# EAGLE board APP_UD (EAGLE 6.1)
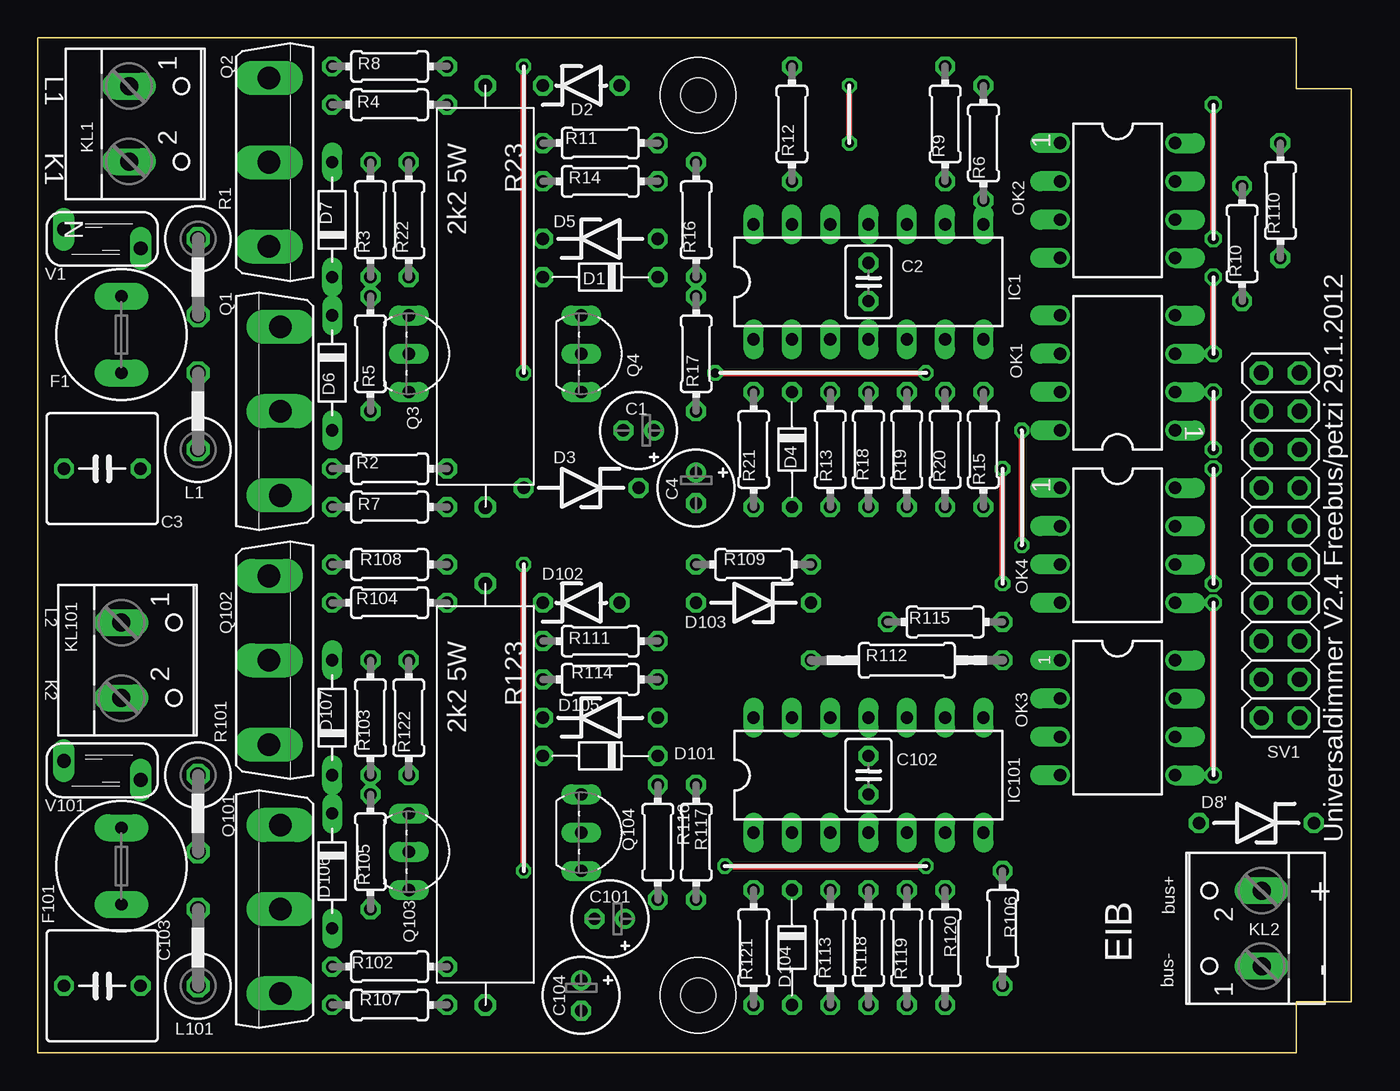
[diagram p0: board, top side]
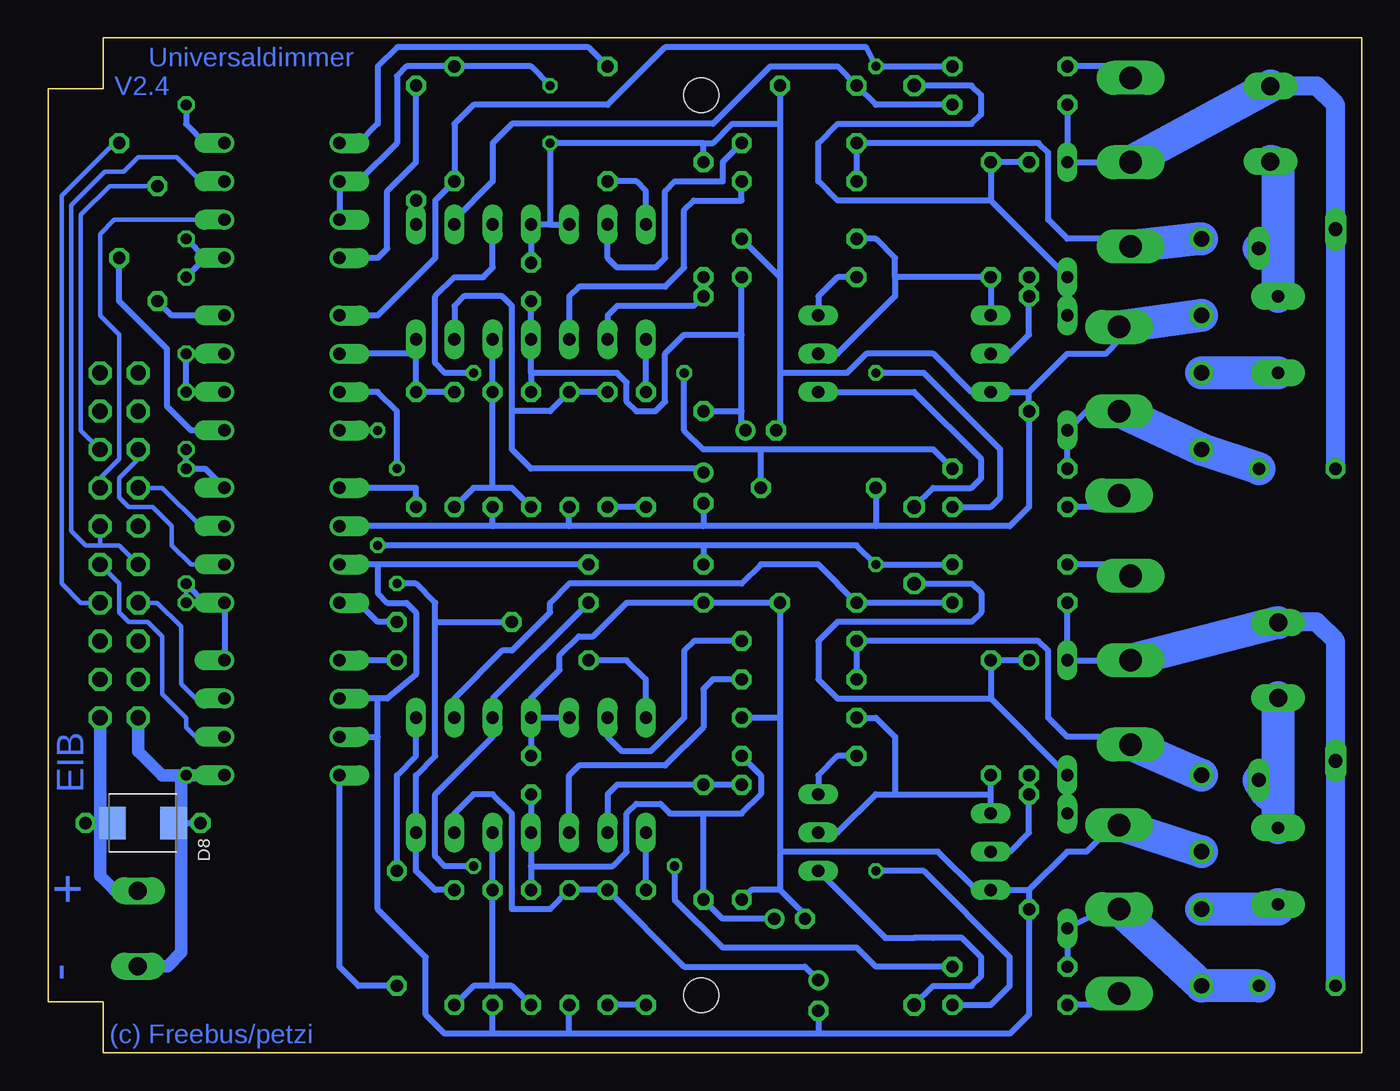
[diagram p1: board, bottom side, seen from below]

Size 87.1 x 67.31 mm. Coordinates in mm from the lower left corner, seen from the top.
Outline: 0,0.01 83.45,0 83.45,3.38 87.1,3.38 87.1,63.93 83.45,63.93 83.45,67.31 0,67.31 0,0.01
Copper layers (1*16): Top 0.035mm / dielectric 1.5mm / Bottom 0.035mm
Design rules: minimum track width 10mil, minimum drill 23mil, track to track 12mil, track to pad 12mil, pad to pad 16mil, via to via 16mil, smd to smd 8mil, copper to edge 10mil, drill to drill 10mil, minimum pad ring 10mil, minimum via ring 8mil, stop-mask expansion 4mil, vias tented up to drill 0mil, thermal gap 10mil
Holes 2.3 mm at 43.79,3.81 43.79,63.5

## Footprints (pad centres in the part's own frame; a part is rotated, then mirrored left to right if it is on the bottom)
E2-5 = drill 0.813 pad 1.27: + -1.016,0 | drill 0.813 pad 1.27 octagon: - 1.016,0
C025-030X050 = drill 0.813 octagon: 1 -1.27,0; 2 1.27,0
C050-075X075 = drill 0.813 octagon: 1 -2.54,0; 2 2.54,0
D-7 = drill 0.813 octagon: A 3.81,0; C -3.81,0
ZDIO-5 = drill 0.813 octagon: A 2.54,0; C -2.54,0
ZDIO-7.5 = drill 0.813 octagon: A 3.81,0; C -3.81,0
D-7.5 = drill 0.813 long: A 3.81,0; C -3.81,0
SMBJ = smd 1.78 x 2.16: A 2.04,0; C -2.03,0
TR5 = drill 0.813 pad 1.778 long: 1 -2.54,0; 2 2.54,0
DIL14 = drill 0.813 long: 1 -7.62,-3.81; 2 -5.08,-3.81; 3 -2.54,-3.81; 4 0,-3.81; 5 2.54,-3.81; 6 5.08,-3.81; 7 7.62,-3.81; 8 7.62,3.81; 9 5.08,3.81; 10 2.54,3.81; 11 0,3.81; 12 -2.54,3.81; 13 -5.08,3.81; 14 -7.62,3.81
W237-102 = drill 1.194 long: 1 -2.5,-1.27; 2 2.5,-1.27
0414V = drill 1.016 octagon: 1 -2.54,0; 2 2.54,0
DIL08 = drill 0.813 offset: 1 -3.81,-3.81; 2 -1.27,-3.81; 3 1.27,-3.81; 4 3.81,-3.81; 5 3.81,3.81; 6 1.27,3.81; 7 -1.27,3.81; 8 -3.81,3.81
TO247BV = drill 1.499 long: D 0,-2.921; G -5.588,-2.921; S 5.588,-2.921
TO92-EBC = drill 0.813 long: B 0,-1.27; C -2.54,-1.27; E 2.54,-1.27
TO92-EBC' = drill 0.813 long: B 0,-1.27; C 2.54,-1.27; E -2.54,-1.27
0204/7 = drill 0.813 octagon: 1 -3.81,0; 2 3.81,0
KH208-8_10B = drill 0.9 octagon: P$1 -13.97,0; P$2 13.97,0
0207/12 = drill 0.813 octagon: 1 -6.35,0; 2 6.35,0
2X10 = drill 1.016 octagon: 1 -11.43,-1.27; 2 -11.43,1.27; 3 -8.89,-1.27; 4 -8.89,1.27; 5 -6.35,-1.27; 6 -6.35,1.27; 7 -3.81,-1.27; 8 -3.81,1.27; 9 -1.27,-1.27; 10 -1.27,1.27; 11 1.27,-1.27; 12 1.27,1.27; 13 3.81,-1.27; 14 3.81,1.27; 15 6.35,-1.27; 16 6.35,1.27; 17 8.89,-1.27; 18 8.89,1.27; 19 11.43,-1.27; 20 11.43,1.27
S05K11 = drill 0.914 long: 1 -0.635,-2.54; 2 0.635,2.54

## Placement (x,y rotation side)
C1  47u  [E2-5]  39.84,41.27 180 top
C2  100n  [C025-030X050]  55.08,51.12 90 top
C3  6.8nF  [C050-075X075]  4.28,38.73 180 top
C4  47u  [E2-5]  43.65,37.46 270 top
C101  47u  [E2-5]  37.94,8.89 180 top
C102  100n  [C025-030X050]  55.08,18.42 90 top
C103  6.8nF  [C050-075X075]  4.28,4.45 180 top
C104  47u  [E2-5]  36.03,3.81 270 top
D1  1N4007  [D-7]  37.3,51.43 180 top
D2  ZF6.8  [ZDIO-5]  36.03,64.14 0 top
D3  ZF6.8  [ZDIO-7.5]  36.03,37.46 180 top
D4  1N4148  [D-7]  50,40 270 top
D5  ZF15  [ZDIO-7.5]  37.3,53.98 0 top
D6  1N4007  [D-7.5]  19.52,45.09 270 top
D7  1N4007  [D-7.5]  19.52,55.24 90 top
D8  SMAJ40CA  [SMBJ]  80.8,15.24 0 bottom
D8'  P6KE39A  [ZDIO-7.5]  80.8,15.24 180 top
D101  1N4007  [D-7]  37.3,19.69 180 top
D102  ZF6.8  [ZDIO-5]  36.03,29.85 0 top
D103  ZF6.8  [ZDIO-7.5]  47.46,29.85 180 top
D104  1N4148  [D-7]  50,6.98 270 top
D105  ZF15  [ZDIO-7.5]  37.3,22.23 0 top
D106  1N4007  [D-7.5]  19.52,12.06 270 top
D107  1N4007  [D-7.5]  19.52,22.23 90 top
F1  2A  [TR5]  5.55,47.62 270 top
F101  2A  [TR5]  5.55,12.38 270 top
IC1  LM324N  [DIL14]  55.08,51.12 0 top
IC101  LM324N  [DIL14]  55.08,18.42 0 top
KL1  [W237-102]  7.32,61.59 270 top
KL2  [W237-102]  79.88,8.26 90 top
KL101  [W237-102]  6.82,26.04 270 top
L1  3uH  [0414V]  10.63,42.54 90 top
L101  3uH  [0414V]  10.63,6.98 90 top
OK1  ILD74  [DIL08]  71.59,45.09 90 top
OK2  ILD74  [DIL08]  71.59,56.52 270 top
OK3  ILD74  [DIL08]  71.59,22.23 270 top
OK4  ILD74  [DIL08]  71.59,33.66 270 top
Q1  IRFP460  [TO247BV]  13.17,42.54 90 top
Q2  IRFP460  [TO247BV]  18.25,59.05 270 top
Q3  BC546B  [TO92-EBC]  25.87,46.35 270 top
Q4  MPSA44  [TO92-EBC']  37.3,46.35 270 top
Q101  IRFP460  [TO247BV]  13.17,9.53 90 top
Q102  IRFP460  [TO247BV]  18.25,26.04 270 top
Q103  BC546B  [TO92-EBC]  25.87,13.33 270 top
Q104  MPSA44  [TO92-EBC']  37.3,14.61 270 top
R1  0,1  [0414V]  10.63,51.43 270 top
R2  100k  [0204/7]  23.33,38.73 0 top
R3  4M3  [0204/7]  22.06,55.24 90 top
R4  100k  [0204/7]  23.33,62.86 0 top
R5  22k  [0204/7]  22.06,46.35 90 top
R6  5k6  [0204/7]  62.7,60.32 270 top
R7  1k  [0204/7]  23.33,36.2 180 top
R8  1k  [0204/7]  23.33,65.41 180 top
R9  22k  [0204/7]  60.16,61.59 90 top
R10  1k  [0204/7]  79.84,53.66 270 top
R11  100  [0204/7]  37.3,60.32 180 top
R12  100k  [0204/7]  50,61.59 270 top
R13  100k  [0204/7]  52.54,40 270 top
R14  100k  [0204/7]  37.3,57.78 180 top
R15  12k  [0204/7]  62.7,40 90 top
R16  3k9  [0204/7]  43.65,55.24 90 top
R17  220k  [0204/7]  43.65,46.35 90 top
R18  100k  [0204/7]  55.08,40 270 top
R19  100k  [0204/7]  57.62,40 90 top
R20  22k  [0204/7]  60.16,40 270 top
R21  470  [0204/7]  47.46,40 90 top
R22  100k  [0204/7]  24.6,55.24 90 top
R23  2k2 5W  [KH208-8_10B]  29.68,50.16 270 top
R101  0,1  [0414V]  10.63,15.88 270 top
R102  100k  [0204/7]  23.33,5.71 0 top
R103  4M3  [0204/7]  22.06,22.23 90 top
R104  100k  [0204/7]  23.33,29.85 0 top
R105  22k  [0204/7]  22.06,13.33 90 top
R106  5k6  [0204/7]  63.97,8.26 90 top
R107  1k  [0204/7]  23.33,3.17 180 top
R108  1k  [0204/7]  23.33,32.38 180 top
R109  22k  [0204/7]  47.46,32.38 0 top
R110  1k  [0204/7]  82.38,56.52 270 top
R111  100  [0204/7]  37.3,27.31 180 top
R112  100k  [0207/12]  57.62,26.04 180 top
R113  100k  [0204/7]  52.54,6.98 270 top
R114  100k  [0204/7]  37.3,24.77 180 top
R115  12k  [0204/7]  60.16,28.58 180 top
R116  3k9  [0204/7]  41.11,13.97 270 top
R117  220k  [0204/7]  43.65,13.97 90 top
R118  100k  [0204/7]  55.08,6.98 270 top
R119  100k  [0204/7]  57.62,6.98 270 top
R120  22k  [0204/7]  60.16,6.98 90 top
R121  470  [0204/7]  47.46,6.98 90 top
R122  100k  [0204/7]  24.6,22.23 90 top
R123  2k2 5W  [KH208-8_10B]  29.68,17.15 270 top
SV1  [2X10]  82.38,33.66 90 top
V1  7N391K  [S05K11]  4.28,53.98 270 top
V101  7N391K  [S05K11]  4.28,18.73 270 top

## Library data of the parts
C1-C4 C101-C104 L1 L101 R1-R22 R101-R122 = rcl
D1-D8 D8' D101-D107 = diode
F1 F101 = fuse
IC1 IC101 = linear
KL1 KL2 KL101 = con-wago-500
OK1-OK4 = optocoupler
Q1 Q2 Q101 Q102 = transistor-power
Q3 Q103 = transistor-npn
Q4 Q104 = transistor
R23 R123 = resistor-power
SV1 = pinhead
V1 V101 = varistor

## Nets
AGND1: C1.- C2.2 C4.- D2.A D3.A D5.A IC1.11 IC1.12 OK2.2 OK2.3 OK4.2 Q1.S Q3.E R1.2 R5.1 R9.2 R13.2 R16.2 R19.1
AGND2: C101.- C102.2 C104.- D102.A D103.A D105.A IC101.11 IC101.12 OK3.2 OK3.3 OK4.3 Q101.S Q103.E R101.2 R105.1 R109.2 R113.2 R116.2 R119.2
GND: D8'.A D8.A KL2.1 OK1.2 OK1.3 OK2.5 OK2.8 OK3.5 OK3.8 OK4.5 OK4.8 SV1.2
N$1: R10.1 SV1.15
N$2: OK1.4 R10.2
N$3: C3.1 D6.A L1.1 Q1.D R2.1
N$4: Q2.S R1.1 R11.2 R14.2
N$5: OK2.6 SV1.13
N$6: IC1.7 OK1.6 R15.2 R20.1
N$7: OK2.7 SV1.10 SV1.11
N$8: F1.1 KL1.2 V1.2
N$9: Q2.G R8.2
N$10: OK1.1 R110.2
N$11: IC1.3 R14.1
N$12: D6.C D7.C R3.2 R22.2 R23.P$1
N$13: OK2.4 R6.1
N$14: IC101.7 OK1.7 R115.2 R120.2
N$15: IC1.8 R6.2
N$16: Q3.B R3.1 R5.2
N$17: Q1.G R7.2
N$18: C3.2 D7.A KL1.1 Q2.D R4.1 V1.1
N$20: D8'.C D8.C KL2.2 SV1.1
N$21: IC1.2 R16.1 R17.2
N$22: F1.2 L1.2
N$23: D3.C IC1.10 R2.2
N$24: D2.C IC1.9 R4.2
N$25: IC1.1 R21.2
N$26: C103.2 D107.A KL101.1 Q102.D R104.1 V101.1
N$27: OK3.1 R112.1
N$28: OK2.1 R12.1
N$30: C4.+ D4.C IC1.6 R13.1
N$31: D5.C Q3.C Q4.B R22.1
N$32: OK4.1 R15.1
N$33: OK4.7 SV1.14
N$34: IC1.5 R18.2 R19.2 R20.2
N$35: Q4.C R23.P$2
N$36: OK1.8 R107.1 R108.1 R109.1
N$38: Q102.S R101.1 R111.2 R114.2
N$40: Q102.G R108.2
N$42: D106.C D107.C R103.2 R122.2 R123.P$1
N$43: D103.C IC101.10 R102.2
N$44: D102.C IC101.9 R104.2
N$45: OK3.4 R106.1
N$46: IC101.8 R106.2
N$47: D1.A Q4.E
N$48: IC1.14 R12.2
N$49: Q103.B R103.1 R105.2
N$50: OK3.6 SV1.9
N$51: OK3.7 SV1.8
N$52: R110.1 SV1.7
N$53: Q101.G R107.2
N$54: IC101.13 R111.1
N$55: D105.C Q103.C Q104.B R122.1
N$57: IC101.3 R114.1
N$58: IC101.2 R116.1 R117.2
N$59: IC101.1 R121.2
N$60: C104.+ D104.C IC101.6 R113.1
N$61: OK4.4 R115.1
N$62: OK4.6 SV1.16
N$63: Q104.C R123.P$2
N$64: D4.A R21.1
N$65: D104.A R121.1
N$66: IC101.5 R118.2 R119.1 R120.1
N$68: D101.A Q104.E
N$69: OK1.5 R7.1 R8.1 R9.1
N$71: F101.1 KL101.2 V101.2
N$72: IC101.14 R112.2
N$73: F101.2 L101.2
N$74: IC1.13 R11.1
N$75: C103.1 D106.A L101.1 Q101.D R102.1
V12-C1: C1.+ C2.1 D1.C IC1.4 R17.1 R18.1
V12-C2: C101.+ C102.1 D101.C IC101.4 R117.1 R118.1
VCC: SV1.5

## Tracks (layer width: path | path; a pad name or v marks a point on that pad's centre or on a via)
AGND1  (via drill 0.6)
  Top 0.406: v53.81,60.32 v53.81,64.14
  Bottom 0.406: 52.54,34.92 57.62,34.92 | 57.62,34.92 OK4.2 | 52.54,34.92 R13.2 | 57.62,34.92 R19.1 | 32.22,34.92 23.33,34.92 22.06,36.2 R5.1 22.06,43.81 | 32.22,34.92 43.65,34.92 | 43.65,34.92 52.54,34.92 | OK2.3 OK2.2 66.51,57.78 63.97,60.32 63.97,64.77 63.34,65.41 R9.2 55.08,65.41 v53.81,64.14 | 53.81,54.93 IC1.12 | 53.81,54.93 IC1.11 C2.2 | 53.81,54.93 v53.81,60.32 43.65,60.32 | R16.2 43.65,60.32 | 38.57,61.59 38.57,51.43 | 38.57,51.43 38.57,45.09 | 38.57,45.09 38.57,41.27 C1.- | 43.65,60.32 43.02,60.32 41.75,61.59 38.57,61.59 | D2.A 38.57,61.59 | D5.A 38.57,51.43 | C4.- 43.65,34.92 | D3.A 32.22,34.92 | 22.06,43.81 19.52,46.35 16.98,46.35 16.09,47.24 Q1.S | 22.06,43.81 Q3.E 25.87,43.81 28.41,46.35 32.85,46.35 34.12,45.09 38.57,45.09
  Bottom 2.184: R1.2 Q1.S
AGND2
  Bottom 0.406: 57.62,1.27 R119.2 | 52.54,1.27 R113.2 | 65.24,32.38 OK4.3 | 52.54,1.27 57.62,1.27 | 36.03,1.27 23.33,1.27 22.06,2.54 R105.1 22.06,10.79 | 36.03,1.27 52.54,1.27 | R109.2 65.24,32.38 | IC101.12 IC101.11 | 65.24,23.5 64.61,23.5 62.7,25.08 62.7,29.21 63.34,29.85 64.61,29.85 65.24,30.48 65.24,32.38 | 65.24,23.5 OK3.2 | IC101.11 C102.2 | 38.57,22.23 D105.A | 57.62,1.27 60.8,1.27 62.07,2.54 62.07,6.35 65.24,9.53 65.24,20.96 | 65.24,20.96 65.24,23.5 | OK3.3 65.24,20.96 | 22.06,10.79 Q103.E 25.55,10.79 28.09,13.33 38.57,13.33 | Q101.S 16.47,15.11 18.25,13.33 19.52,13.33 22.06,10.79 | 38.57,22.23 D102.A D103.A 48.73,29.85 50.95,27.62 51.91,27.62 53.18,26.35 53.18,25.4 55.08,23.5 IC101.11 | 38.57,22.23 38.57,13.33 | 38.57,13.33 38.57,10.79 | C104.- 36.03,1.27 | 38.57,10.79 40.48,10.79 R116.2 | C101.- 36.92,9.14 38.57,10.79
  Bottom 2.184: R101.2 Q101.S
GND  (via drill 0.7)
  Top 0.406: v77.94,53.98 v77.94,62.86 | v77.94,46.35 v77.94,51.43 | v77.94,40 v77.94,43.81 | v77.94,31.12 v77.94,38.73 | v77.94,18.42 v77.94,29.85
  Bottom 0.305: v77.94,29.85 v77.94,31.12
  Bottom 0.406: OK2.8 76.67,60.32 77.94,61.59 v77.94,62.86 | 76.67,52.7 OK2.5 | 76.67,52.7 v77.94,53.98 | v77.94,51.43 76.67,52.7 | OK1.3 v77.94,46.35 v77.94,43.81 OK1.2 | OK4.8 76.67,38.73 v77.94,38.73 v77.94,40 | v77.94,31.12 76.67,29.85 OK4.5 | OK4.5 OK3.8 | v77.94,29.85 OK4.5 | D8.A 78.26,15.24 D8'.A
  Bottom 0.813: v77.94,18.42 OK3.5 | v77.94,18.42 79.53,18.42 81.11,20 SV1.2 | KL2.1 79.17,5.75 78.26,6.67 78.26,15.24 78.26,15.88 78.26,18.1 v77.94,18.42
N$1
  Bottom 0.305: SV1.15 84.92,41.27 84.92,55.56 83.02,57.47 R10.1
N$2
  Bottom 0.406: 76.67,48.89 OK1.4 78.89,48.89 R10.2
N$3
  Bottom 0.406: R2.1 D6.A 18.25,42.54 Q1.D
  Bottom 2.184: Q1.D L1.1 C3.1
N$4
  Bottom 0.406: Q2.S 15.84,53.98 19.52,53.98 20.79,55.24 20.79,59.69 21.42,60.32 R11.2 R14.2
  Bottom 2.184: R1.1 Q2.S
N$5
  Bottom 0.305: SV1.13 83.66,38.1 82.38,39.37 82.38,47.62 83.66,48.89 83.66,54.29 82.7,55.24 OK2.6
N$6
  Bottom 0.406: 62.7,46.35 R15.2 R20.1 | 62.7,46.35 IC1.7 | 62.7,46.35 OK1.6
N$7
  Bottom 0.305: SV1.10 82.38,33.66 83.66,33.66 | OK2.7 76.99,57.78 78.57,59.37 81.11,59.37 82.07,58.42 83.34,58.42 85.56,56.2 85.56,34.61 84.61,33.66 83.66,33.66 | 83.66,33.66 SV1.11
N$8
  Bottom 2.184: F1.1 5.55,53.98 | 5.55,53.98 5.55,58.59 arc-90 KL1.2 | V1.2 6.19,53.34 arc-90 5.55,53.98
N$9
  Bottom 0.406: R8.2 16.09,65.41 Q2.G
N$10
  Bottom 0.406: OK1.1 77.62,41.27 79.21,42.86 79.21,46.67 82.38,49.85 R110.2
N$11
  Bottom 0.406: R14.1 41.11,56.52 44.29,56.52 44.92,55.88 44.92,52.07 46.19,50.8 51.91,50.8 52.54,50.16 IC1.3
N$12
  Bottom 0.406: R3.2 R22.2 24.6,56.52 | 24.6,56.52 34.76,56.52 36.03,57.78 36.03,60.32 34.76,61.59 25.87,61.59 25.23,62.23 25.23,63.5 25.87,64.14 R23.P$1 | 24.6,56.52 D7.C
  Bottom 0.61: D6.C D7.C
N$13
  Bottom 0.406: R6.1 62.7,59.05 64.61,57.15 64.61,53.34 65.24,52.7 OK2.4
N$14  (via drill 0.6)
  Top 0.406: v63.97,31.12 v63.97,38.73
  Bottom 0.406: OK1.7 65.24,43.81 63.97,42.54 v63.97,38.73 | R120.2 61.43,10.79 62.7,12.06 IC101.7 62.7,18.42 61.43,19.69 61.43,28.58 | 61.43,28.58 61.43,29.85 62.7,31.12 v63.97,31.12 | 61.43,28.58 R115.2
N$15
  Bottom 0.406: IC1.8 R6.2
N$16
  Bottom 0.406: R3.1 R5.2 22.06,47.62 23.33,46.35 Q3.B
N$17
  Bottom 0.406: Q1.G 16.85,36.2 R7.2
N$18
  Bottom 0.406: 15.71,59.44 Q2.D D7.A R4.1
  Bottom 1.27: C3.2 V1.1 1.74,62.86 2.97,64.09 KL1.1
  Bottom 2.184: KL1.1 Q2.D
N$20
  Bottom 0.406: 83.66,15.24 D8.C 82.83,14.61 83.02,14.61 83.02,15.24 D8'.C
  Bottom 0.813: SV1.1 83.66,15.24 83.66,11.75 82.7,10.79 81.19,10.79 KL2.2
N$21
  Bottom 0.406: IC1.2 50,48.89 49.37,49.53 44.29,49.53 R17.2 R16.1
N$22
  Bottom 2.184: F1.2 L1.2
N$23  (via drill 0.6)
  Top 0.406: v44.92,45.09 v58.89,45.09
  Bottom 0.406: IC1.10 57.62,52.07 58.26,51.43 60.16,51.43 61.43,50.16 61.43,45.72 60.8,45.09 v58.89,45.09 | 39.84,40 28.41,40 R2.2 | D3.C 39.84,40 | 39.84,40 43.65,40 44.92,41.27 v44.92,45.09
N$24
  Bottom 0.406: IC1.9 60.16,55.24 57.62,57.78 57.62,60.32 56.35,61.59 43.02,61.59 39.21,65.41 34.76,65.41 D2.C 32.22,62.86 R4.2
N$25
  Bottom 0.406: R21.2 IC1.1
N$26
  Bottom 0.406: 15.33,26.92 Q102.D 15.39,26.04 15.71,26.04 D107.A R104.1
  Bottom 1.27: KL101.1 5.51,28.58 3.01,28.58 1.74,27.31 V101.1 C103.2
  Bottom 2.184: KL101.1 Q102.D
N$27
  Bottom 0.406: R112.1 OK3.1
N$28
  Bottom 0.406: OK2.1 66.51,60.32 65.24,61.59 65.24,65.41 63.97,66.68 51.27,66.68 R12.1
N$30
  Bottom 0.406: 60.16,47.62 IC1.6 60.16,49.53 59.52,50.16 56.98,50.16 56.35,49.53 56.35,42.54 | C4.+ 43.65,38.73 55.08,38.73 56.35,40 56.35,42.54 | D4.C R13.1 53.81,42.54 56.35,42.54
N$31
  Bottom 0.406: Q3.C R22.1 30.95,51.43 | 30.95,51.43 30.95,50.16 34.76,46.35 Q4.B | 30.95,51.43 30.95,52.7 32.22,53.98 D5.C
N$32
  Bottom 0.406: OK4.1 62.7,37.46 R15.1
N$33
  Bottom 0.305: SV1.14 79.53,37.46 76.99,34.92 OK4.7
N$34
  Bottom 0.406: IC1.5 R19.2 57.62,37.46 | R18.2 56.35,37.46 57.62,37.46 | 57.62,37.46 58.89,37.46 R20.2
N$35
  Bottom 0.406: Q4.C 29.68,43.81 25.23,39.37 25.23,38.1 25.87,37.46 28.41,37.46 R23.P$2
N$36  (via drill 0.6)
  Top 0.406: v32.22,12.06 v32.22,32.38 | v65.24,33.66 v65.24,41.27
  Bottom 0.406: R108.1 v32.22,32.38 33.49,33.66 43.65,33.66 | v65.24,41.27 OK1.8 | 43.65,33.66 v65.24,33.66 | 43.65,33.66 R109.1 | R107.1 24.6,3.17 23.33,4.45 23.33,6.35 29.04,12.06 v32.22,12.06
N$38
  Bottom 0.406: Q102.S 15.84,20.96 19.52,20.96 20.79,22.23 20.79,26.67 21.42,27.31 R111.2 R114.2
  Bottom 2.184: R101.1 Q102.S
N$40
  Bottom 0.406: Q102.G 16.09,32.38 R108.2
N$41  (via drill 0.6)
  other vias: 43.79,63.5
N$42
  Bottom 0.406: R103.2 R122.2 24.6,23.5 | D106.C D107.C 24.6,23.5 | R123.P$1 25.87,31.12 25.23,30.48 25.23,29.21 25.87,28.58 34.76,28.58 36.03,27.31 36.03,24.77 34.76,23.5 24.6,23.5
N$43  (via drill 0.6)
  Top 0.406: v45.55,12.38 v58.89,12.38
  Bottom 0.406: v45.55,12.38 45.55,10.16 42.38,6.98 33.49,6.98 32.22,5.71 R102.2 | D103.C 57.62,23.5 IC101.10 57.62,20.96 61.43,17.15 61.43,13.02 60.8,12.38 v58.89,12.38
N$44
  Bottom 0.406: R104.2 D102.C 36.03,32.38 39.84,32.38 41.11,31.12 52.54,31.12 53.81,29.85 53.81,29.21 56.35,26.67 56.98,26.67 60.16,23.5 IC101.9
N$45
  Bottom 0.406: OK3.4 67.78,5.71 66.51,4.45 R106.1
N$46
  Bottom 0.406: R106.2 63.97,18.42 62.7,19.69 IC101.8
N$47
  Bottom 0.406: D1.A 34.76,51.43 36.03,50.16 Q4.E
N$48
  Bottom 0.406: R12.2 48.09,57.78 47.46,57.15 IC1.14
N$49
  Bottom 0.406: R103.1 R105.2 22.06,14.61 23.33,13.33 Q103.B
N$50
  Bottom 0.305: SV1.9 82.38,31.12 82.38,29.21 81.75,28.58 80.48,28.58 79.53,27.62 79.53,23.81 77.94,22.23 77.94,21.59 77.3,20.96 76.67,20.96
  Bottom 0.406: OK3.6 76.67,20.96
N$51
  Bottom 0.305: SV1.8 79.84,29.85 78.26,28.26 78.26,24.45 77.3,23.5 OK3.7
  Bottom 0.406: OK3.7 76.67,23.5
N$52
  Bottom 0.305: SV1.7 84.92,29.85 86.19,31.12 86.19,56.83 83.02,60.01 82.7,60.01 R110.1
N$53
  Bottom 0.406: R107.2 16.98,3.17 16.22,3.94 Q101.G
N$54
  Bottom 0.406: IC101.13 50,20.96 49.05,20 47.14,20 44.92,22.23 44.92,26.67 44.29,27.31 R111.1
N$55
  Bottom 0.406: Q103.C 24.6,17.15 | 24.6,17.15 R122.1 | 30.95,17.15 24.6,17.15 | D105.C 32.22,22.23 30.95,20.96 30.95,17.15 | Q104.B 34.76,14.61 32.22,17.15 30.95,17.15
N$57
  Bottom 0.406: R114.1 43.02,24.77 43.65,24.13 43.65,21.59 46.19,19.05 51.91,19.05 52.54,18.42 IC101.3
N$58
  Bottom 0.406: R116.1 R117.2 49.37,17.78 50,17.15 IC101.2
N$59
  Bottom 0.406: R121.2 IC101.1
N$60
  Bottom 0.406: IC101.6 60.16,15.88 58.89,17.15 57.62,17.15 56.35,15.88 56.35,9.53 53.81,9.53 R113.1 D104.C 44.92,5.71 36.92,5.71 C104.+
N$61
  Bottom 0.406: R115.1 65.24,28.58 66.51,29.85 OK4.4
N$62
  Bottom 0.305: SV1.16 81.11,39.37 82.38,38.1 82.38,36.83 81.75,36.2 80.16,36.2 78.89,34.92 78.89,33.66 77.62,32.38 OK4.6
N$63
  Bottom 0.406: R123.P$2 28.41,4.45 25.87,4.45 25.23,5.08 25.23,6.35 26.5,7.62 28.41,7.62 29.68,7.62 31.58,7.62 Q104.C
N$64
  Bottom 0.406: R21.1 D4.A
N$65
  Bottom 0.406: R121.1 D104.A
N$66
  Bottom 0.406: R120.1 58.89,4.45 57.62,4.45 | 57.62,4.45 56.35,4.45 R118.2 | 57.62,4.45 R119.1 IC101.5
N$67  (via drill 0.6)
  other vias: 43.79,3.81
N$68
  Bottom 0.406: D101.A 34.76,19.69 36.03,18.42 Q104.E
N$69  (via drill 0.6)
  Top 0.406: v32.22,45.09 v32.22,65.41
  Bottom 0.406: R8.1 v32.22,65.41 32.85,66.68 46.19,66.68 50,62.86 58.89,62.86 60.16,61.59 R9.1 61.43,56.52 61.43,52.7 65.24,48.89 OK1.5 | R7.1 24.6,36.2 23.96,36.83 23.96,40 29.04,45.09 v32.22,45.09
N$71
  Bottom 2.184: F101.1 5.55,17.15 | 5.55,17.15 KL101.2 | V101.2 6.19,17.15 5.55,17.15
N$72
  Bottom 0.406: IC101.14 47.46,24.77 48.73,26.04 R112.2
N$73
  Bottom 2.184: F101.2 5.55,9.53 L101.2
N$74
  Bottom 0.406: IC1.13 50,52.7 49.37,52.07 46.83,52.07 46.19,52.7 46.19,57.15 45.55,57.78 42.38,57.78 42.38,59.05 R11.1
N$75
  Bottom 0.406: R102.1 D106.A 16.98,9.53 Q101.D
  Bottom 2.184: Q101.D L101.1 C103.1
V12-C1
  Bottom 0.406: 55.08,45.09 IC1.4 C2.1 | 41.11,47.62 44.92,47.62 46.19,46.35 46.19,43.18 46.83,42.54 48.09,42.54 48.73,43.18 48.73,44.45 49.37,45.09 55.08,45.09 | 55.08,45.09 R18.1 | 41.11,47.62 D1.C | 41.11,42.54 41.11,41.27 C1.+ 40.79,41.27 | 41.11,42.54 41.11,47.62 | R17.1 41.11,42.54
V12-C2
  Bottom 0.406: IC101.4 55.08,12.38 | 55.08,12.38 R118.1 | IC101.4 55.08,15.88 | C102.1 IC101.4 | 55.08,12.38 49.68,12.38 48.73,13.33 48.73,15.88 48.09,16.51 46.51,16.51 45.87,15.88 43.65,15.88 | D101.C 39.84,18.42 39.84,17.15 41.11,15.88 43.65,15.88 | 43.65,15.88 R117.1 42.38,8.89 C101.+

## Text on the board
Bottom: Universaldimmer | V2.4 | EIB | + | - | (c) Freebus/petzi
tPlace: L1 | K1 | 1 | N | 1 | 1 | L2 | 1 | K2 | Universaldimmer V2.4 Freebus/petzi 29.1.2012 | bus+ | + | EIB | bus- | -
Outside: 1 | 2 | 8 | 9 | 24 | 25